# Altium PCB Solar_Charger_PCBDoc.PcbDoc
Units mil, origin at the board's own origin, x right, y up, seen from the top; angles counter-clockwise.
Board outline 3260 x 1985 mil, 2 copper layers (Top Layer, Bottom Layer); 10 components, 8 nets, 22 pads, 0 vias.
Unrouted connection lines stored in the file: 2.
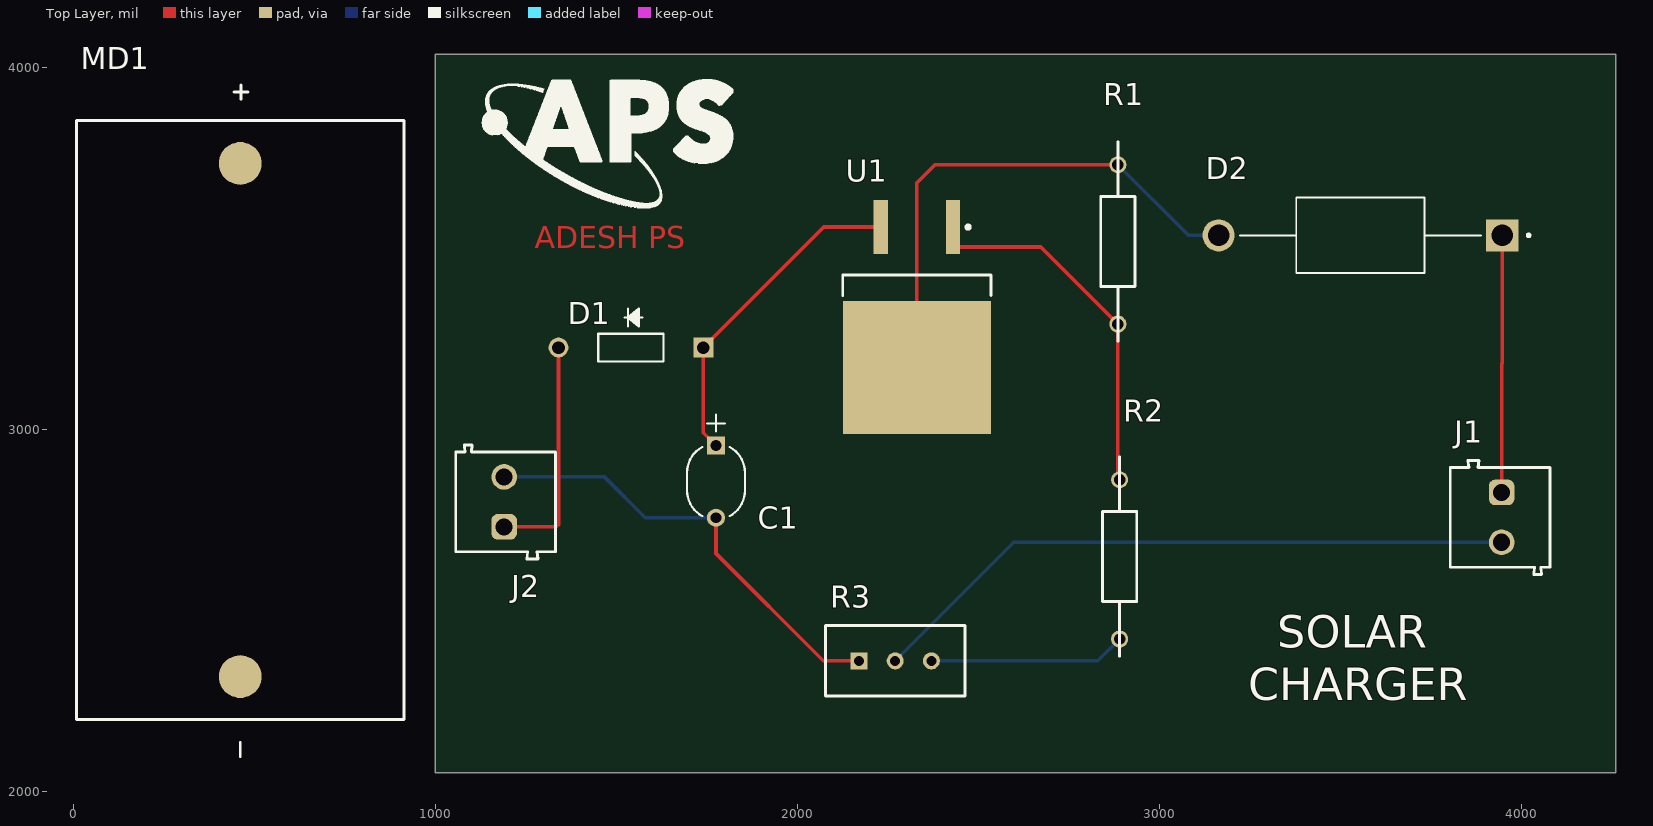
[diagram p0: Top Layer view]
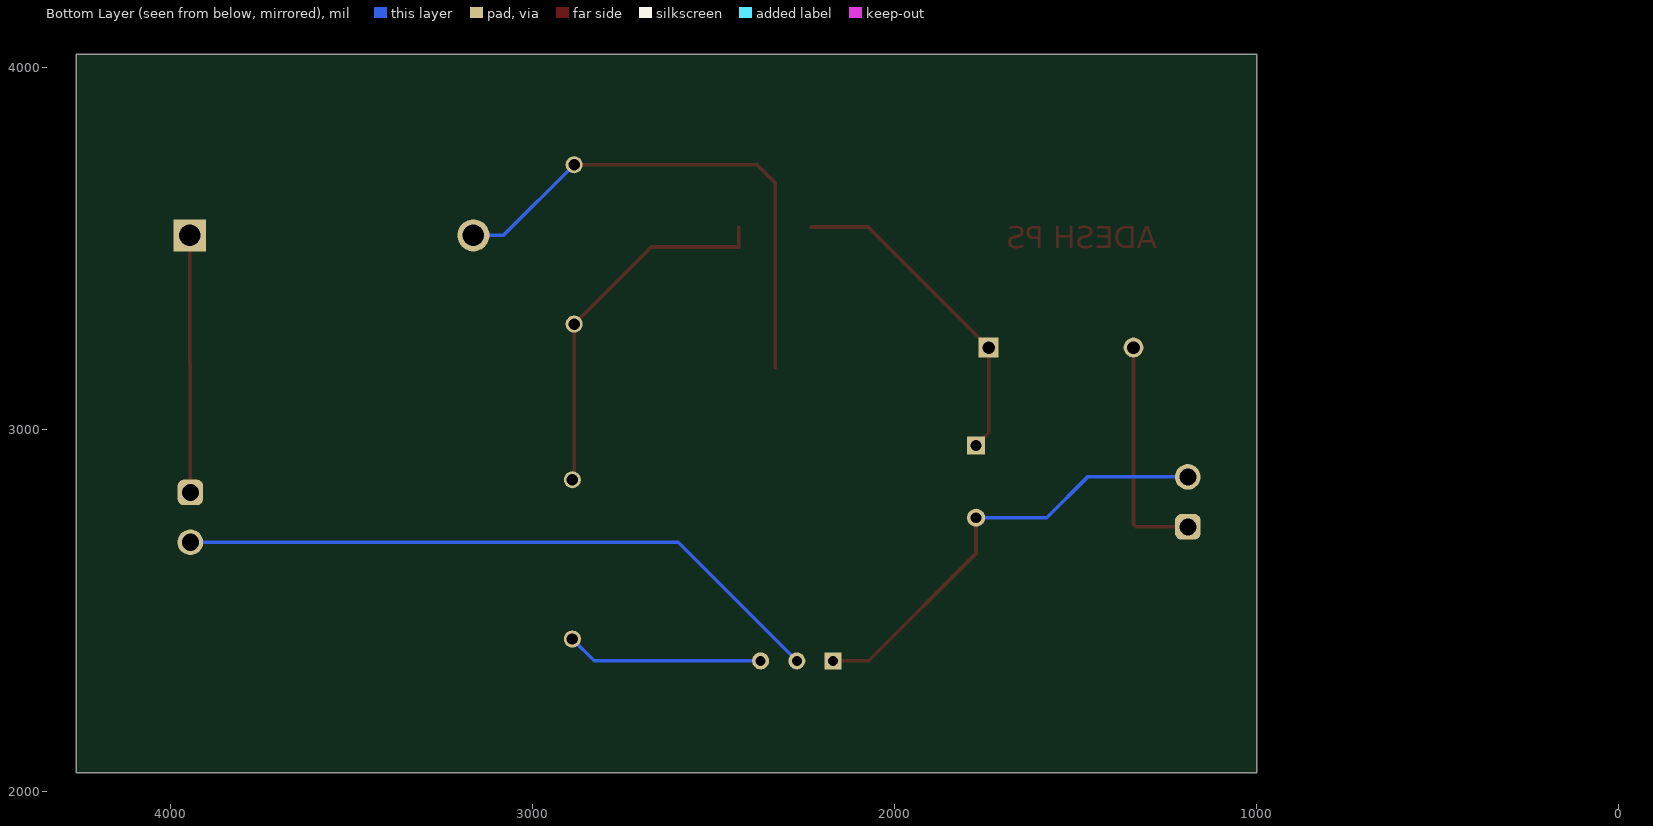
[diagram p1: Bottom Layer view, seen from below]

## Layer stack, top to bottom
Top Solder: solder mask 0.4, Solder Resist, Dk 3.5
Top Layer: signal copper 1.4
Dielectric 1: dielectric 12.6, FR-4, Dk 4.8
Bottom Layer: signal copper 1.4
Bottom Solder: solder mask 0.4, Solder Resist, Dk 3.5

## Board outline
1000,2050 4260,2050 4260,4035 1000,4035

## Design rules (kind name [scope] priority, off if disabled: settings)
Clearance [All] p1: gap=10 ignorepadtopadclearanceinfootprint=FALSE except(0: Arc-Hole Track-Hole SMDPad-Hole THPad-Hole Via-Hole Fill-Hole Poly-Hole Region-Hole Text-Hole)
PolygonConnect [All] p1: connectstyle=Relief reliefconductorwidth=10 reliefentries=4 polygonreliefangle="90 Angle" airgapwidth=10
RoutingVias [All] p1: holewidth=28 width=50 viastyle="Through Hole" minholewidth=28 minwidth=50 maxholewidth=28 maxwidth=50
SolderMaskExpansion [All] p1: expansion=4 istentingtop=FALSE
Width [All] p1: maxlimit=10 minlimit=10 preferedwidth=10
30 further rules are at their usual default settings.

## Components (designator, comment, footprint, x,y, rotation, side; value= is the part's Value field where it differs from the comment)
C1 "C322C104K1R5TA" CAP_C322_KEM 1775,2955 r270 top
D1 "1N4007" DIO_1N5282 1740,3225 r0 top
D2 "SR305" DIOAD1990W125L900D530 3555,3535 r180 top
J1 "691103110002" 691103110002 53941.06,-47243.9 r270 top
J2 "691103110002" 691103110002 -48806.06,52798.9 r90 top
MD1 "SM141K06L" FP-SM141K06L-MFG 461,3025 r90 top
R1 "CFR-25JR-52-1K" RESAD1590W60L630D240 2885,3205 r90 top
R2 "CFR-25JR-52-1K" RESAD1590W60L630D240 2890,2335 r90 top
R3 "3296W-1-202LF" FP-3296W-MFG 2270,2360 r270 top
U1 "LM317D2T-TR" TO-263_N 2330,3309.76 r270 top

## Footprints (in the part's own frame and the unit in brackets; to place one, negate y for a bottom-side part, rotate by r counter-clockwise, add the part's x,y. Pads: shape width x height; smd on the part's side, far side on the other; paste and mask are expansions set on the pad)
691103110002 [mm] "3,50mm - modular - blue - Horizontal wire entry - Pressure clamp - 8,4mm height - 02p"
  rrect50% 1.8x1.8 hole 1.2: 1(-1271.75,-1269.9)
  round 1.8 hole 1.2: 2(-1268.25,-1269.9)
  silkscreen extent -1274,-1273.5 -1266,-1266.5, body extent -1274,-1273.5 -1266,-1266.5, height 8.45
CAP_C322_KEM [mil]
  rect 50x50 / inner round 60 / far side rect 50x50 hole 30 paste-99999 mask-25: 1(0,0)
  round 50 / inner round 60 / far side round 50 hole 30 paste-99999 mask-25: 2(200,0)
  silkscreen extent -85,-80 195,80, body extent -10,-75 210,75, height 260
DIO_1N5282 [mil]
  round 55 hole 35: 1(-400,0)
  rect 55x55 / inner round 55 / far side rect 55x55 hole 35: 2(0,0)
  silkscreen extent -290,-38 -110,108, body extent -410,-38 10,38, height 75
DIOAD1990W125L900D530 [mm]
  round 2.25 hole 1.5: A(9.95,0)
  rect 2.25x2.25 hole 1.5: C(-9.95,0)
  silkscreen extent -11.9,-2.65 8.47,2.65, body extent -10.58,-2.8 10.58,2.8, height 5.6
FP-3296W-MFG [mm]
  rect 1.2x1.2 hole 0.7 paste-2539.97 mask+0: 1(0.005,-2.54)
  round 1.2 hole 0.7 paste-2539.97 mask+0: 2(0.005,0) 3(0.005,2.54)
  silkscreen extent -2.48,-4.89 2.48,4.89, body extent -2.58,-4.99 2.58,4.99, height 0.25
FP-SM141K06L-MFG [mm]
  round 3 smd paste+0 mask+0: 1(-18,0) 2(18,0)
  silkscreen extent -23.62,-11.5 23.5,11.5, body extent -21.1,-11.6 21.1,11.6, height 0.25
RESAD1590W60L630D240 [mm]
  round 1.2 hole 0.8: 1(2.159,0) 2(13.335,0)
  silkscreen extent 0.95,-1.2 14.95,1.2, body extent 1.97,-1.3 13.52,1.3, height 2.6
TO-263_N [mm] "D2-PAK, 4-Leads, Body 9.2x10.2mm, Pitch 2.54mm, Lead Span 15.4mm, IPC Medium Density"
  rect 3.8x1 smd: 1(-6.3,2.54) 3(-6.3,-2.54)
  rect 9.3x10.4 smd: 4(3.55,0)
  silkscreen extent -6.42,-5.2 -1.5,5.2, body extent -2.95,-5.2 6.4,5.2, height 4.6

## Part data
C1: "No Description Available", Mfr_Name=Kemet, Copyright="Copyright (C) 2023 Ultra Librarian. All rights reserved.", Manufacturer_Part_Number=C322C104K1R5TA, RefDes=RefDes, Type=DEV
D1: "Diode 1000 V 1A Through Hole DO-41", Package=None, Availability="In Stock", Check_prices=https://www.snapeda.com/parts/1N5282/Onsemi/view-part/?ref=eda, MF=ON, MP=1N5282, Price=None, Purchase-URL=https://pricing.snapeda.com/search/part/1N5282/?ref=eda, SnapEDA_Link=https://www.snapeda.com/parts/1N5282/Onsemi/view-part/?ref=snap
D2: "3A, 50V, Schottky Rectifier", Package="SMD-2-2 Avago", Availability="In Stock", Check_prices=https://www.snapeda.com/parts/SR305/Taiwan+Semiconductor/view-part/?ref=eda, MF="Taiwan Semiconductor", MP=SR305, Price=None, SnapEDA_Link=https://www.snapeda.com/parts/SR305/Taiwan+Semiconductor/view-part/?ref=snap
J1 J2: library part Terminal_Block, Color=Blue, Current=10A, Max Operating Temperature=105°C, Min Operating Temperature=-40°C, Voltage=125V, Contact Material="Brass, Copper, Nickel, Tin, Zinc", Contact Plating=Tin, Current Rating=10A, Height=8.5mm, Housing Material=Nylon, Lead Pitch=3.5mm, Length=7mm, Mount="Through Hole", NexarPartId=18818286, Number of Contacts=2, Number of Levels=1, Number of Pins=2, Number of Positions Per Level=2, Number of Rows=1, Packaging=Box, Pitch=3.5052mm, Plating=Steel, REACH SVHC=Unknown, RoHS=Compliant, Stripping Length=-6mm, Termination=Screw, Voltage Rating=125V, Width=8mm, Wire Gauge (Max)=26AWG, Wire Gauge (Min)=16AWG, Wire/Cable Gauge=26AWG
MD1: library part CMP-48341-000002-1, "MONOCRYST SOLAR CELL 184MW 4.15V"
R1 R2: "1.1 kOhms Â±5% 0.25W, 1/4W Through Hole Resistor Axial - Carbon Film", Package="Axial Yageo", Check_prices=https://www.snapeda.com/parts/CFR-25JR-52-1K/Yageo/view-part/?ref=eda, MF=Yageo, MP=CFR-25JR-52-1K, SnapEDA_Link=https://www.snapeda.com/parts/CFR-25JR-52-1K/Yageo/view-part/?ref=snap
R3: library part CMP-2000-05582-2, "TRIMMER 2K OHM 0.5W PC PIN TOP", Color=Blue, Max Operating Temperature=125°C, Max Power Dissipation=500mW, Min Operating Temperature=-55°C, Package Quantity=50, Resistance=2kR, Resistance Tolerance=10%, Resistor Type=Cermet, Temperature Coefficient=100ppm/°C, Contact Plating=Tin, Depth=4.83mm, Height=0.395inch, Lead Free="Lead Free", Length=9.53mm, Military Standard=Not, Mount=Panel, Number of Turns=25, Packaging=Rail/Tube, Power Rating=500mW, Radiation Hardening=No, REACH SVHC="No SVHC", RoHS Compliant=Yes, Series=3296, Taper=Linear, Technology=CERMET, Termination=Pin, Tolerance=10%, Weight=0.03oz, Width=9.53mm
U1: library part CMP-0244-00094-1, "1.5A, 1.2V to 37V Adjustable Voltage Regulator, 3-Pin D2PAK, Tape and Reel", ComponentLink1Description="Manufacturer URL", ComponentLink1URL=http://www.st.com, ComponentLink2Description=Datasheet, ComponentLink2URL=http://www.st.com/internet/com/TECHNICAL_RESOURCES/TECHNICAL_LITERATURE/DATASHEET/CD00000455.pdf, DatasheetVersion=1/11/2011, PackageDescription="3-Pin Transistor Outline Package 2.54 mm Pitch, 15.4 mm Lead Span (D2PAK)", PackageReference=TO-263, PackageVersion=2011

## Nets (pads, with @x,y where several pads share a name; then routed paths per layer and width w, separated by ;. In a path a pad name is that pad's centre, name@x,y a point inside that pad or via, vN(x,y) a via of type N, cw(c..) or ccw(c..) an arc to the next point about the centre after c; other vN are vias at no path point)
GND: J1.2 R3.2 | length 1810.6
  Bottom Layer w10: R3.2 2597.4,2687.2 J1.2
NetC1_1: C1.1 D1.2 U1.3 | length 912.6
  Top Layer w10: C1.1 1740,2990 D1.2 2073,3558 2230,3558 U1.3
NetC1_2: C1.2 J2.2 MD1.2 R3.1 | length 1248.4
  Top Layer w10: C1.2 1775,2656 2071.2,2359.8 R3.1
  Bottom Layer w10: J2.2 1467.2,2867.8 1580,2755 C1.2
NetD1_1: D1.1 J2.1 MD1.1 | length 641.6
  Top Layer w10: J2.1 1334.14,2730 1340,2735.86 D1.1
NetD2_A: D2.A R1.2 U1.4 | length 1444.8
  Top Layer w10: U1.4 2330,3680 2380,3730 R1.2
  Bottom Layer w10: R1.2 3080,3535 D2.A
NetD2_C: D2.C J1.1 | length 710.7
  Top Layer w10: J1.1 3945,3180 3946.73,3181.73 D2.C
NetR1_1: R1.1 R2.2 U1.1 | length 1028
  Top Layer w10: U1.1 2430,3503 2672,3503 R1.1 R2.2@2885,2860
NetR2_1: R2.1 R3.3 | length 544.9
  Bottom Layer w10: R3.3 2829.8,2359.8 R2.1

## Other copper
Top Layer:
  text "ADESH PS" at 1275,3500 h60

## Silkscreen, mask and mechanical layers (free items; w line width, h text height)
Top Overlay:
  drawing of 3 lines, arcs and shapes, not listed
  text "SOLAR" at 3325.3,2395.3 h90
  text "CHARGER" at 3245.3,2250.3 h90